# EAGLE board me433_elton_cheng (EAGLE 8.1.0)
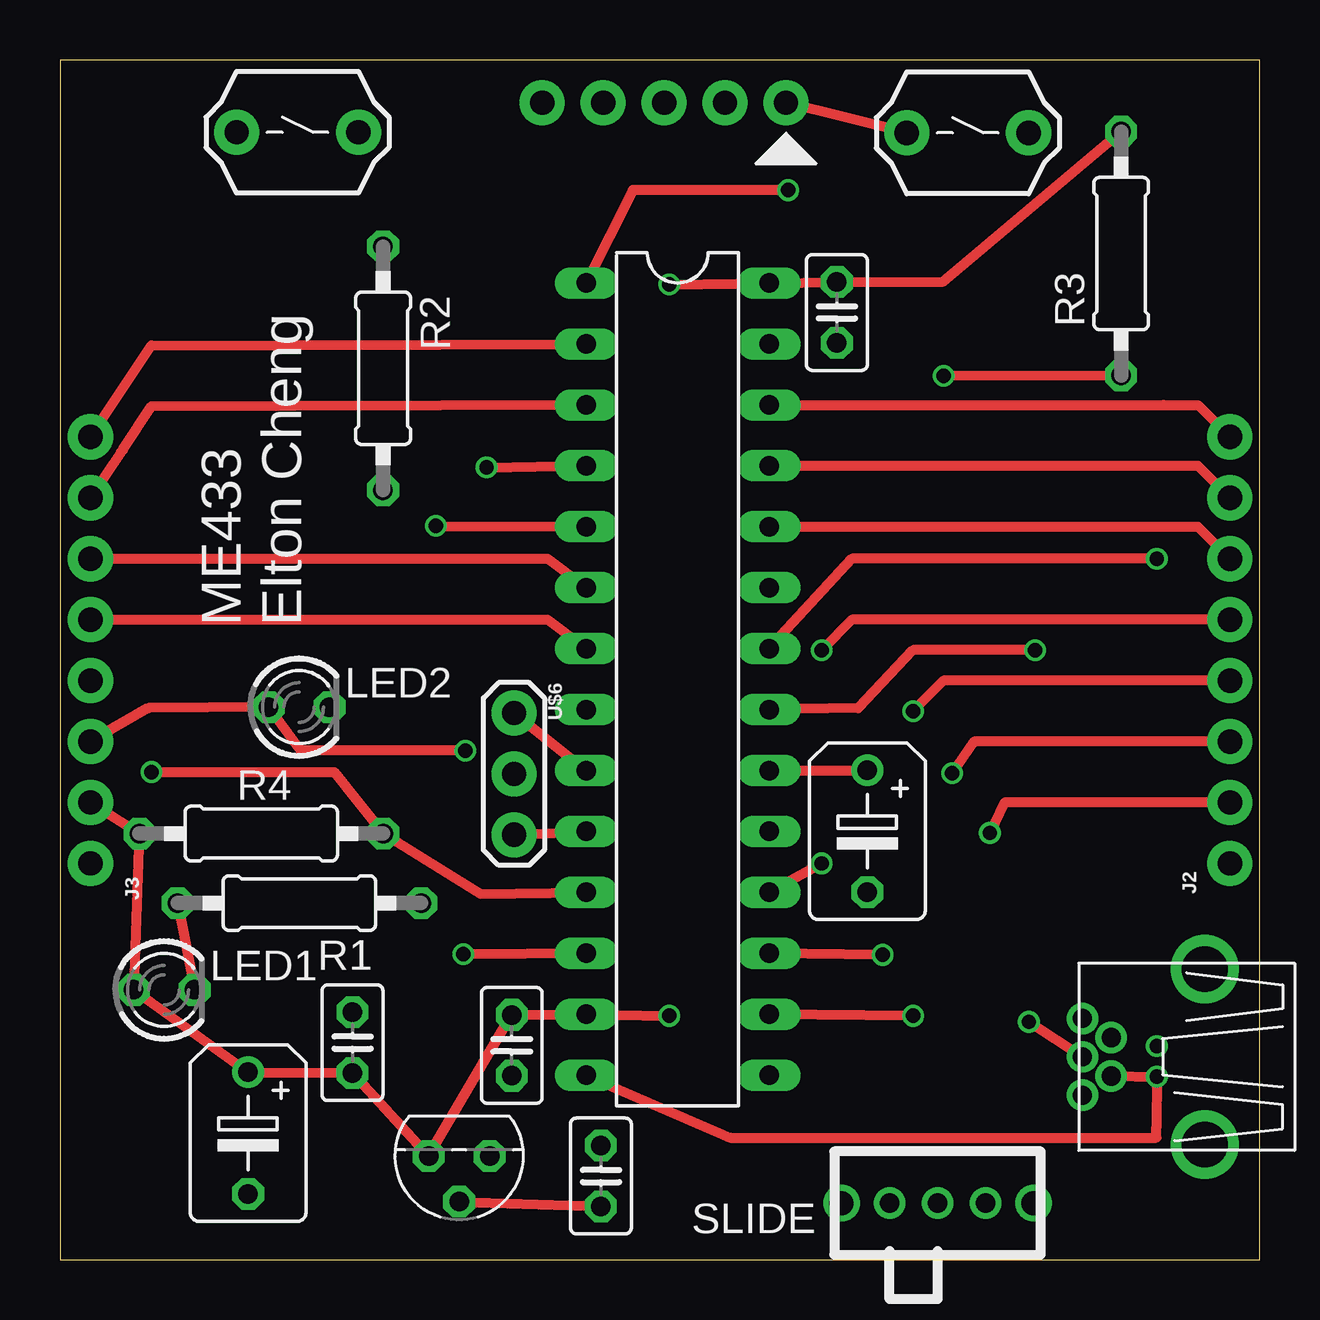
[diagram p0: board, top side]
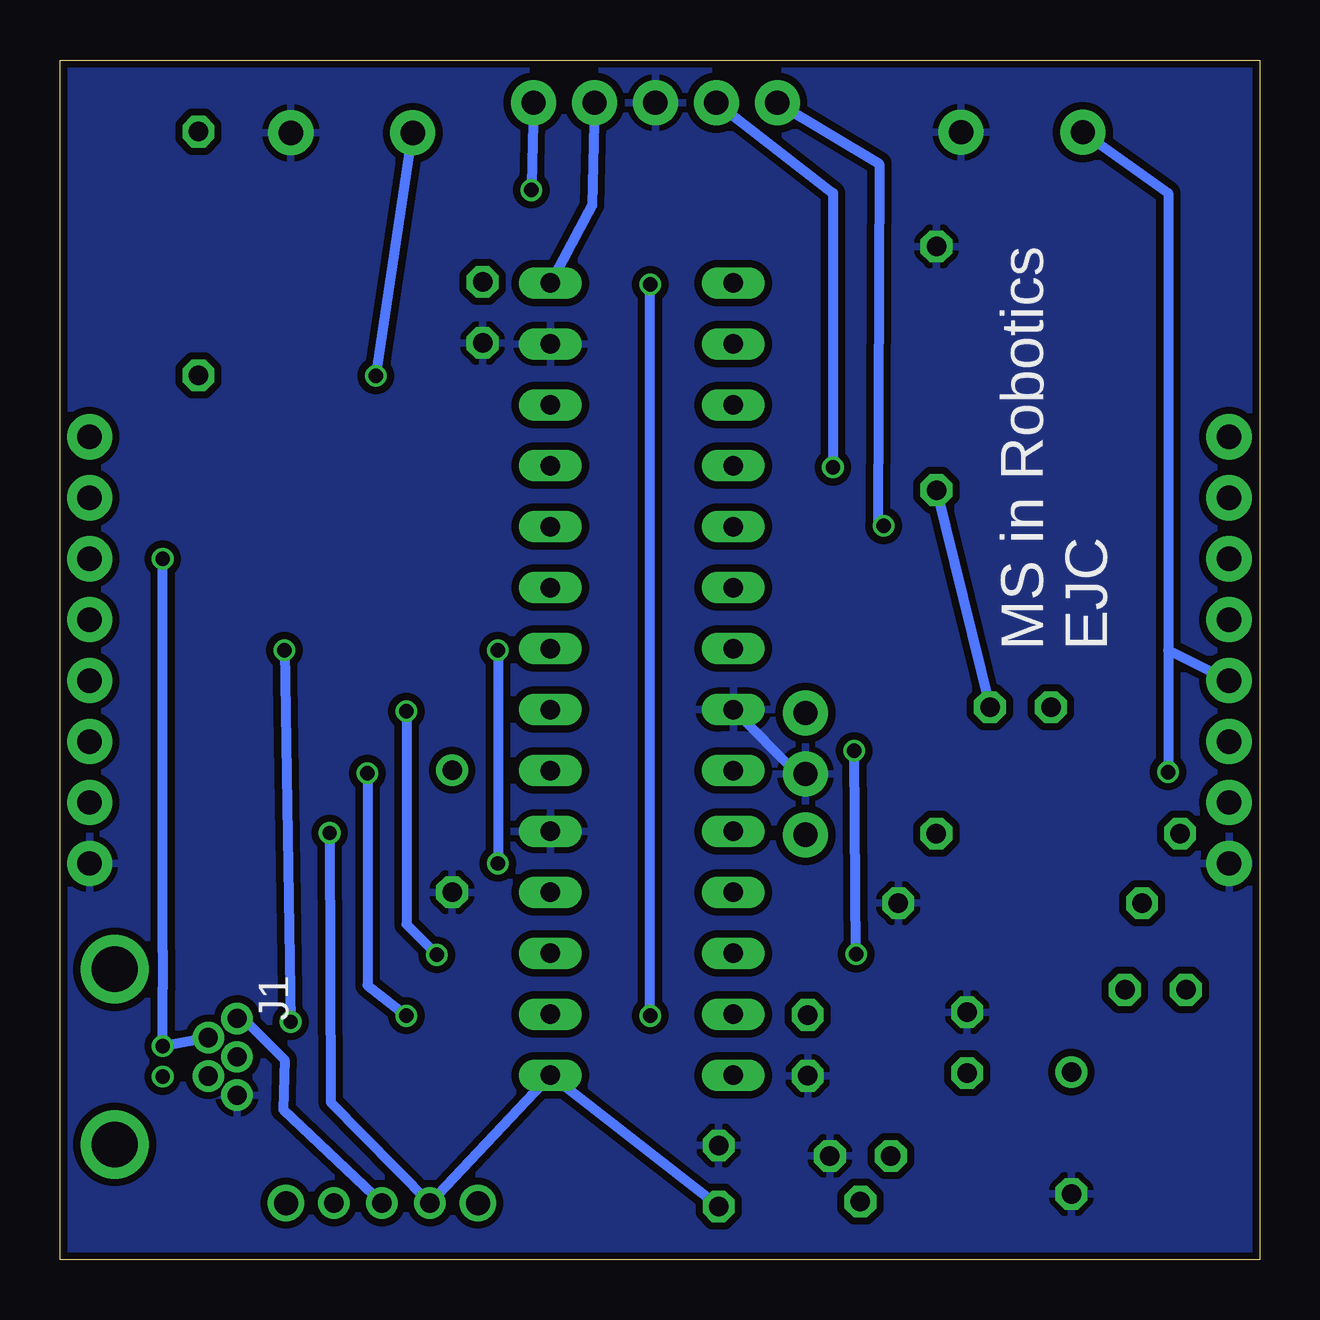
[diagram p1: board, bottom side, seen from below]

Size 50 x 50 mm. Coordinates in mm from the lower left corner, seen from the top.
Outline: 0,0 50,0 50,50 0,50 0,0
Copper layers (1*16): Top 0.035mm / dielectric 1.5mm / Bottom 0.035mm
Design rules "SeeedStudio_2layer_DRU_no_angle_20140221": minimum track width 6mil, minimum drill 12mil, track to track 6mil, track to pad 6mil, pad to pad 6mil, via to via 6mil, smd to smd 0mil, copper to edge 10mil, drill to drill 10mil, minimum pad ring 10mil, minimum via ring 6mil, stop-mask expansion 2mil, vias tented up to drill 100mil, thermal gap 10mil

## Footprints (pad centres in the part's own frame; a part is rotated, then mirrored left to right if it is on the bottom)
C025-025X050 = drill 0.813 octagon: 1 -1.27,0; 2 1.27,0
B45181B = drill 0.813: + -2.54,0 | drill 0.813 octagon: - 2.54,0
USB-MB-H = drill 0.8: D+ 5.1,0; D- 3.9,0.8; GND 5.1,-1.6; ID 3.9,-0.8; VBUS 5.1,1.6 | drill 1.9: P$6 0,-3.65; P$7 0,3.65
1X08 = drill 1.016 pad 1.88: 1 0,0; 2 2.54,0; 3 5.08,0; 4 7.62,0; 5 10.16,0; 6 12.7,0; 7 15.24,0; 8 17.78,0
LED3MM = drill 0.813 octagon: A -1.27,0; K 1.27,0
0207/10 = drill 0.813 octagon: 1 -5.08,0; 2 5.08,0
DIL28-3 = drill 0.813 long: 1 -16.51,-3.81; 2 -13.97,-3.81; 3 -11.43,-3.81; 4 -8.89,-3.81; 5 -6.35,-3.81; 6 -3.81,-3.81; 7 -1.27,-3.81; 8 1.27,-3.81; 9 3.81,-3.81; 10 6.35,-3.81; 11 8.89,-3.81; 12 11.43,-3.81; 13 13.97,-3.81; 14 16.51,-3.81; 15 16.51,3.81; 16 13.97,3.81; 17 11.43,3.81; 18 8.89,3.81; 19 6.35,3.81; 20 3.81,3.81; 21 1.27,3.81; 22 -1.27,3.81; 23 -3.81,3.81; 24 -6.35,3.81; 25 -8.89,3.81; 26 -11.43,3.81; 27 -13.97,3.81; 28 -16.51,3.81
SLIDE = drill 0.8: 1 -2,0; 2 0,0; 3 2,0 | drill 1: P$1 -4,0; P$2 4,0
TO92 = drill 0.813 octagon: 1 -1.27,0; 2 0,1.905; 3 1.27,0
PB = drill 1.016 pad 1.88: 1 -2.54,0; 2 2.54,0
OSC = drill 1.016 pad 1.88: 1 -2.54,0; 2 0,0; 3 2.54,0
1X05 = drill 1.016 pad 1.88: 1 0,0; 2 2.54,0; 3 5.08,0; 4 7.62,0; 5 10.16,0

## Placement (x,y rotation side)
C1  0.1uF  [C025-025X050]  32.38,39.47 270 top
C2  0.1uF  [C025-025X050]  18.83,8.93 270 top
C3  0.1uF  [C025-025X050]  22.55,3.48 90 top
C4  0.1uF  [C025-025X050]  12.19,9.04 90 top
C5  10uF  [B45181B]  33.66,17.85 270 top
C6  10uF  [B45181B]  7.84,5.27 270 top
J1  USB-MB-H  [USB-MB-H]  47.72,8.45 0 bottom
J2  [1X08]  48.77,16.51 90 top
J3  [1X08]  1.27,16.51 90 top
LED1  [LED3MM]  4.34,11.24 0 top
LED2  [LED3MM]  9.97,23.03 0 top
R1  330  [0207/10]  9.98,14.86 180 top
R2  330  [0207/10]  13.47,37.15 270 top
R3  10k  [0207/10]  44.23,41.93 90 top
R4  10k  [0207/10]  8.39,17.75 180 top
U$1  PIC32MX250F128B  [DIL28-3]  25.75,24.2 270 top
U$2  SLIDE  [SLIDE]  36.58,2.35 180 top
U$3  MCP1702  [TO92]  16.64,4.32 180 top
U$4  RESET  [PB]  37.84,46.96 0 top
U$5  USER  [PB]  9.9,46.99 0 top
U$6  8MHz  [OSC]  18.93,20.24 270 top
U$7  PICKIT3  [1X05]  30.26,48.22 180 top

## Library data of the parts
C1-C6 J1-J3 R1-R4 U$1-U$7 = me433_elton_cheng
LED1 LED2 = led

## Nets
+3V3: C1.1 C2.1 C4.1 C6.+ J3.2 LED1.A R3.2 R4.2 U$1.13 U$1.28 U$3.3 U$7.2
+5V: C3.1 J2.2 U$1.15 U$2.3 U$3.2
A0: J3.8 U$1.2
A1: J3.7 U$1.3
A4/LED: J3.3 LED2.A U$1.12
B2: J3.6 U$1.6
B3: J3.5 U$1.7
B4/USER: J3.4 R4.1 U$1.11 U$5.1
B7: J2.3 U$1.16
B8: J2.4 U$1.17
B9: J2.5 U$1.18
B13: J2.6 U$1.24
B14: J2.7 U$1.25
B15: J2.8 U$1.26
D+: J1.D+ U$1.21
D-: J1.D- U$1.22
GND: C1.2 C2.2 C3.2 C4.2 C5.- C6.- J1.GND J2.1 J3.1 R1.1 R2.1 U$1.8 U$1.19 U$1.27 U$3.1 U$4.2 U$5.2 U$6.2 U$7.3
MCLR: R3.1 U$1.1 U$4.1 U$7.1
N$1: LED1.K R1.2
N$2: C5.+ U$1.20
N$3: LED2.K R2.2
N$4: U$1.9 U$6.1
N$5: U$1.10 U$6.3
N$8: U$1.23
PGC: U$1.5 U$7.5
PGD: U$1.4 U$7.4
USBID: J1.ID U$1.14
VBUS: J1.VBUS U$2.2

## Tracks (layer width: path | path; a pad name or v marks a point on that pad's centre or on a via)
+3V3  (via drill 0.6 pad 0.3)
  Top 0.406: J3.2 R4.2 LED1.A C6.+ C4.1 U$3.3 C2.1 U$1.13 v25.4,10.16 | v25.4,40.64 U$1.28 C1.1 36.83,40.77 R3.2
  Bottom 0.406: v25.4,10.16 v25.4,40.64 | U$7.2 27.81,43.94 U$1.28
+5V  (via drill 0.6 pad 0.3)
  Top 0.406: J2.2 39.37,19.05 v38.76,17.78 | U$3.2 C3.1
  Bottom 0.406: v38.76,17.78 38.71,6.55 U$2.3 U$1.15 C3.1
A0
  Top 0.406: J3.8 3.81,38.1 U$1.2
A1
  Top 0.406: U$1.3 3.81,35.56 2.62,33.77 2.62,33.73 2.54,33.66 J3.7
A4/LED  (via drill 0.6 pad 0.3)
  Top 0.406: J3.3 3.68,22.99 LED2.A 10.03,21.21 v16.89,21.21 | U$1.12 16.94,12.72 v16.82,12.72
  Bottom 0.406: v16.82,12.72 16.89,21.08 v16.89,21.21
B2
  Top 0.406: J3.6 20.32,29.21 U$1.6
B3
  Top 0.406: J3.5 20.32,26.67 U$1.7
B4/USER  (via drill 0.6 pad 0.3)
  Top 0.406: v3.81,20.32 11.43,20.32 R4.1 17.53,15.24 U$1.11
  Bottom 0.406: U$5.1 3.81,44.45 3.81,25.4 | 3.81,25.4 J3.4 | 3.81,25.4 v3.81,20.32
B7  (via drill 0.6 pad 0.3)
  Top 0.406: J2.3 38.1,21.59 v37.19,20.27 | v35.56,10.16 U$1.16
  Bottom 0.406: v37.19,20.27 37.19,11.43 v35.56,10.16
B8  (via drill 0.6 pad 0.3)
  Top 0.406: J2.4 36.83,24.13 v35.56,22.86 | v34.29,12.7 U$1.17
  Bottom 0.406: v35.56,22.86 35.56,13.97 v34.29,12.7
B9  (via drill 0.6 pad 0.3)
  Top 0.406: J2.5 33.02,26.67 v31.75,25.4 | v31.75,16.51 U$1.18
  Bottom 0.406: v31.75,25.4 v31.75,16.51
B13
  Top 0.406: U$1.24 47.43,30.55 J2.6
B14
  Top 0.406: U$1.25 47.43,33.09 J2.7
B15
  Top 0.406: U$1.26 45.99,35.62 46.01,35.61 47.45,35.61 J2.8
D+  (via drill 0.6, 0.6 pad 0.3)
  Top 0.406: v40.64,25.4 35.56,25.4 33.27,22.99 U$1.21 | v40.39,9.91 J1.D+
  Bottom 0.406: v40.64,25.4 v40.39,9.91
D-  (via drill 0.6, 0.6 pad 0.3)
  Top 0.406: v45.72,29.21 33.02,29.21 U$1.22
  Bottom 0.406: v45.72,29.21 45.72,12.84 45.7,12.83 45.7,11.31 45.72,11.29 v45.72,8.89 J1.D-
GND
  Bottom 0.406: U$6.2 19.25,20.24 U$1.8
  pour Bottom (isolate 0.305): 0,0 0,50.04 50.04,50.04 50.04,0
MCLR  (via drill 0.6 pad 0.3)
  Top 0.406: U$4.1 U$7.1 | v30.35,44.58 23.88,44.58 U$1.1 | R3.1 v36.83,36.83
  Bottom 0.406: U$7.1 30.35,44.83 v30.35,44.58 | v36.83,36.83 U$4.1
N$1
  Top 0.406: R1.2 LED1.K
N$2
  Top 0.406: U$1.20 C5.+
N$3
  Bottom 0.406: R2.2 LED2.K
N$4
  Top 0.406: U$6.1 U$1.9
N$5
  Top 0.406: U$6.3 U$1.10
PGC  (via drill 0.6 pad 0.3)
  Top 0.406: v15.67,30.58 U$1.5
  Bottom 0.406: U$7.5 15.85,45.67 15.9,30.66 v15.67,30.58
PGD  (via drill 0.6 pad 0.3)
  Top 0.406: v17.78,33.02 U$1.4
  Bottom 0.406: U$7.4 17.78,44.45 v17.78,33.02
USBID  (via drill 0.6)
  Top 0.406: U$1.14 27.94,5.08 45.7,5.08 45.7,5.53 v45.72,7.62 J1.ID
VBUS
  Bottom 0.406: J1.VBUS 42.36,10.05 40.64,8.33 40.69,6.25 U$2.2

## Text on the board
tPlace: ME433 / Elton Cheng
bPlace: MS in Robotics / EJC